# Altium PCB CL-HC-V2.1 浮点阀.PcbDoc (part 1 of 2)
Units mil, origin at the board's own origin, x right, y up, seen from the top; angles counter-clockwise.
Board outline 12846.15 x 9153.85 mil, 2 copper layers (TopLayer, BottomLayer); 128 components, 528 nets, 506 pads, 1 vias.
Unrouted connection lines stored in the file: 31.
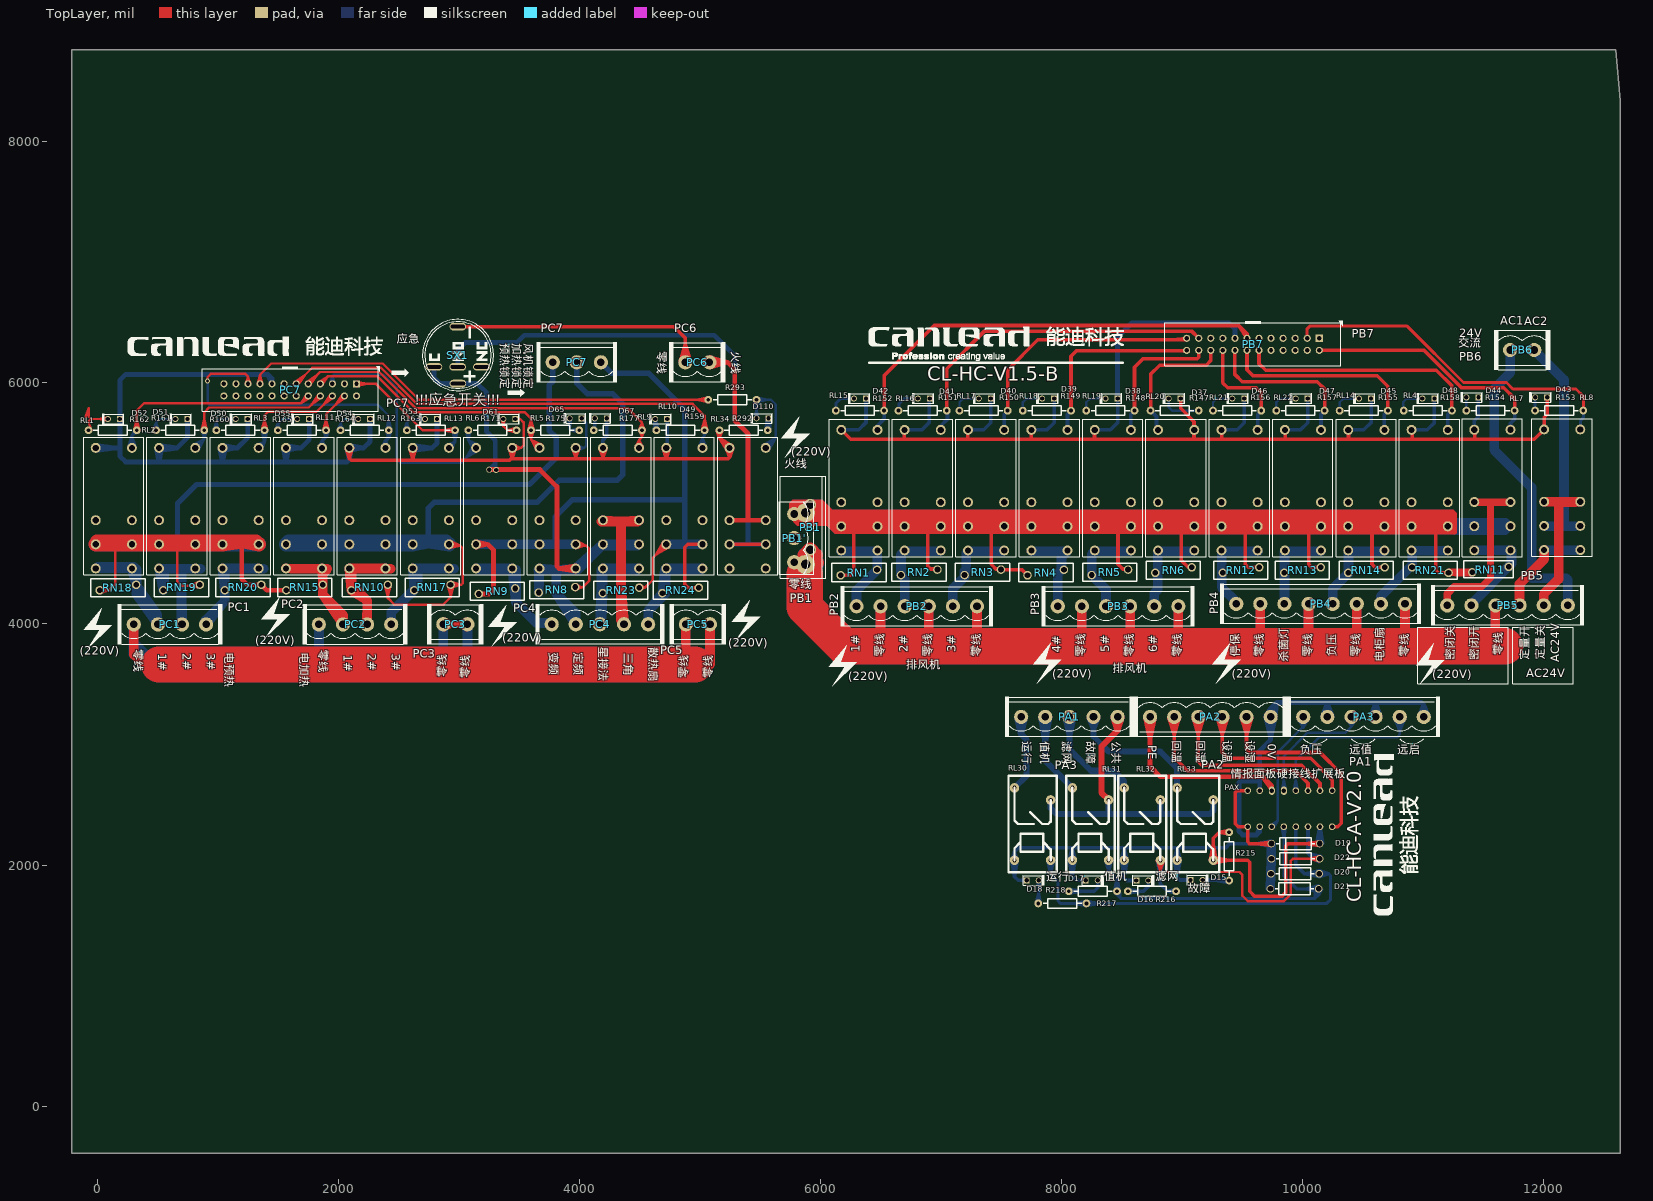
[diagram p0: TopLayer view]
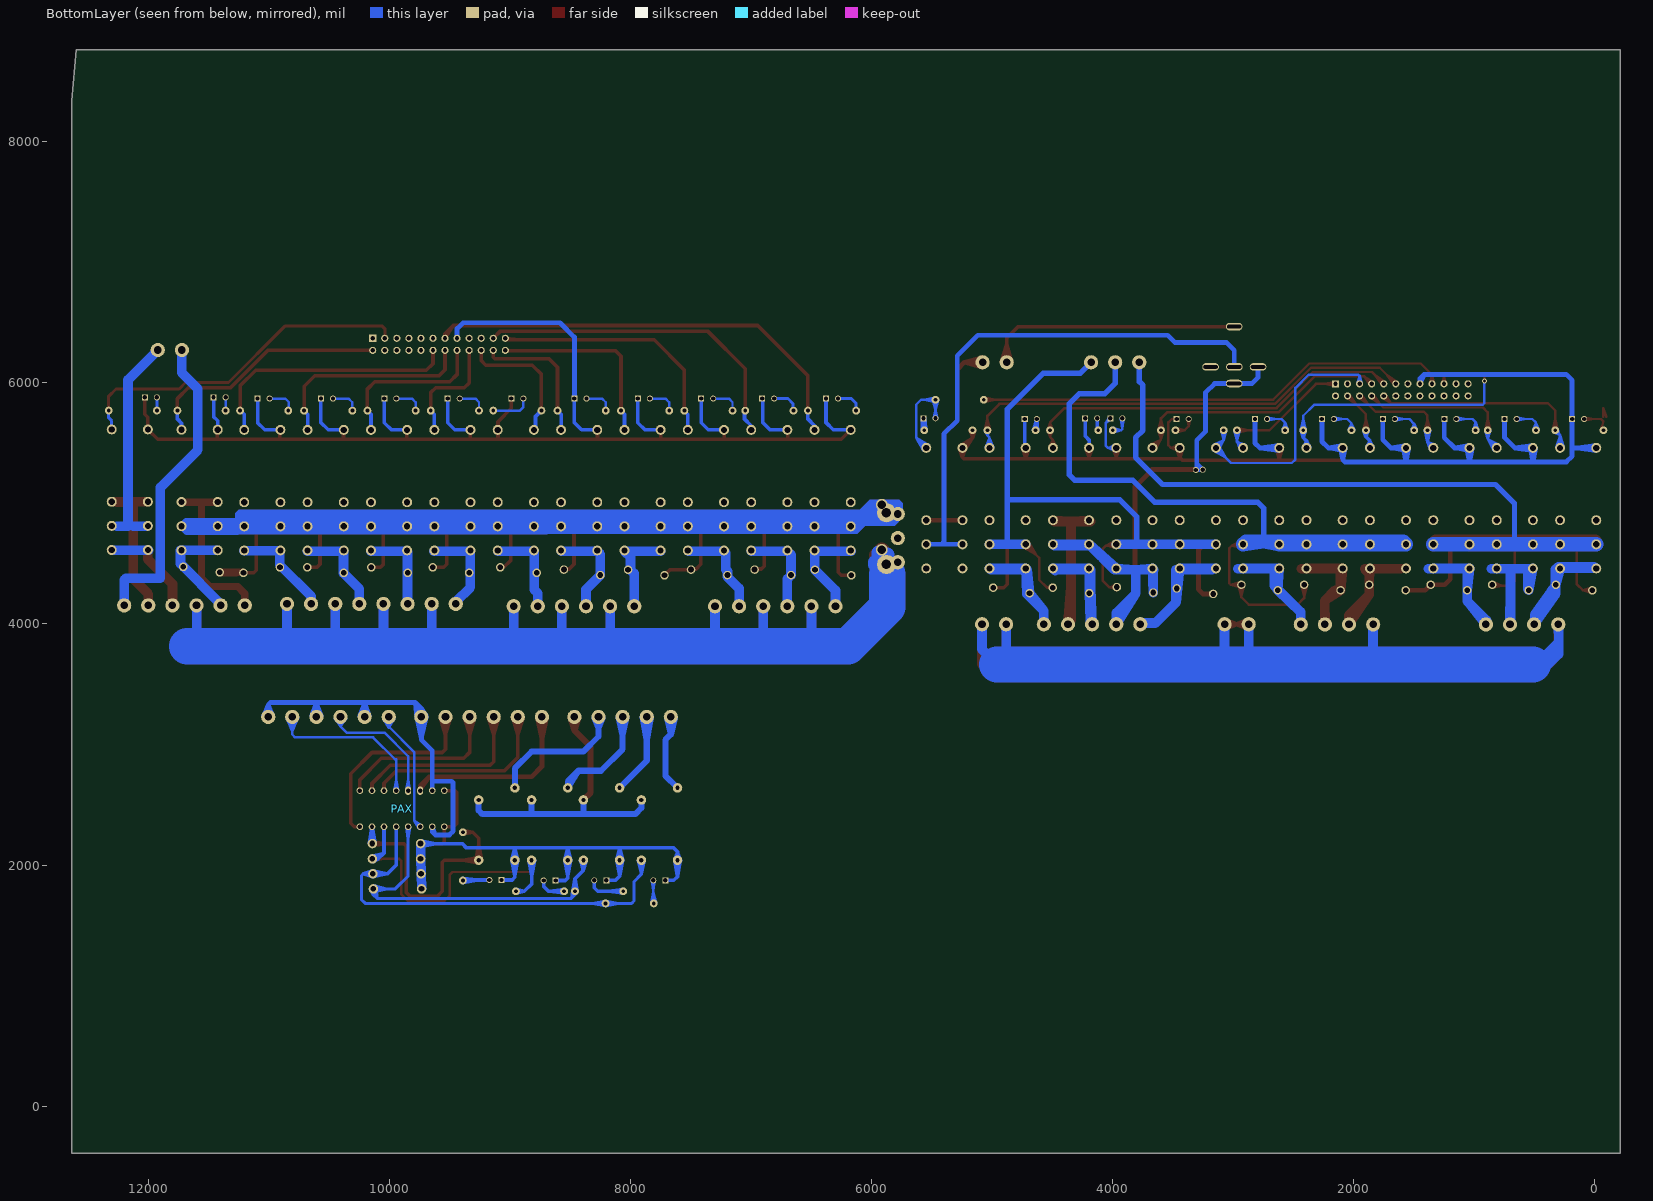
[diagram p1: BottomLayer view, seen from below]

## Layer stack, top to bottom
TopSolder: solder mask 0.4, Solder Resist, Dk 3.5
TopLayer: signal copper 1.4
Dielectric1: dielectric 12.6, FR-4, Dk 4.8
BottomLayer: signal copper 1.4
BottomSolder: solder mask 0.4, Solder Resist, Dk 3.5

## Board outline
12597.31,8763.6 -210.38,8763.6 -210.38,-390.24 12635.77,-390.24 12635.77,8340.52

## Design rules (kind name [scope] priority, off if disabled: settings)
Clearance Clearance_1 [All] p1 off: gap=30
Clearance [All] p2: gap=15
ComponentClearance [All] p1 off: gap=10 collisioncheckmode=3 verticalgap=10 showdistances=FALSE
FabricationTestPointUsage TestPointUsage [All] p1: valid=0 allowmultiple=FALSE
FabricationTestpoint Testpoint [All] p1: side=3 testpointundercomponent=TRUE minsize=40 maxsize=100 preferedsize=60 minholesize=20 maxholesize=40 preferedholesize=32 testpointgrid=1 allowsidetop=TRUE allowsidebottom=TRUE usegrid=TRUE gridtolerance=0.01
PolygonConnect PolygonConnect_1 [All vs (InPadClass('All Pads'))] p1: connectstyle=NoConnect reliefconductorwidth=10 reliefentries=4 polygonreliefangle="90 Angle" airgapwidth=10
PolygonConnect [All] p2: connectstyle=Direct reliefconductorwidth=10 reliefentries=4 polygonreliefangle="90 Angle" airgapwidth=10
RoomDefinition patch [InComponentClass('patch')] p1: confinementstyle=ConfineIn formatcopy=TRUE lockcomponents=FALSE outline -2150,7720.31 -950,7720.31 -950,4279.31 -2150,4279.31
RoomDefinition Lights [InComponentClass('Lights')] p2: confinementstyle=ConfineIn formatcopy=TRUE lockcomponents=FALSE outline 14197.83,3159.45 15242.13,3159.45 15242.13,3920.28 14197.83,3920.28
RoomDefinition MCU单片机 [InComponentClass('MCU单片机')] p3: confinementstyle=ConfineIn formatcopy=TRUE lockcomponents=FALSE outline 15430.12,9928.15 13948.82,9928.15 13948.82,10710.63 15430.12,10710.63
RoutingVias [All] p1: holewidth=24 width=40 viastyle="Through Hole" minholewidth=24 minwidth=40 maxholewidth=24 maxwidth=40
SilkToSolderMaskClearance SilkscreenOverComponentPads [IsPad] p1: minsilkscreentomaskgap=10 clearancetoexposedcopper=TRUE
SolderMaskExpansion [All] p1: expansion=4
Width [All] p1: maxlimit=300 minlimit=10 preferedwidth=30
25 further rules are at their usual default settings.

## Classes and differential pairs
component class Lights: D74 Q11 R118 R194 RN22 Y1 Y2
component class MCU单片机: 1 24V C1 C2 C3 C4 C5 C6 C7 C8 C19 C20 C29 C30 C31 C32 C34 C35 CU1 F F2 P P1 R2 R11 R12 R13 R35 R79 U1 VR1 ѹ? 冷/自/热 定频/变频 客户接线自动门1 情报面 星/三角 电柜内部1 电柜内部2 电柜风扇

## Components (designator, comment, footprint, x,y, rotation, side; value= is the part's Value field where it differs from the comment)
D15 "" RT_LED1 9120.84,1876.11 r180 top (schematic designator D64)
D16 "" RT_LED1 8670.84,1872.22 r180 top (schematic designator D63)
D17 "" RT_LED1 8250.84,1872.74 r180 top (schematic designator D62)
D18 "" RT_LED1 7760.84,1872.74 r180 top (schematic designator D59)
D19 "1n4007" DIODEAK 9941.29,2178.21 r180 top (schematic designator D70)
D20 "1n4007" DIODEAK 9937.32,1927.75 r180 top (schematic designator D69)
D21 "1n4007" DIODEAK 9933.09,1802.53 r180 top (schematic designator D4)
D22 "1n4007" DIODEAK 9941.29,2051.4 r180 top (schematic designator D68)
D37 "GREEN" RT_LED1 8938.5,5869.33 r0 top
D38 "GREEN" RT_LED1 8415.4,5869.33 r0 top
D39 "GREEN" RT_LED1 7889.77,5869.33 r0 top
D40 "GREEN" RT_LED1 7364.14,5869.33 r0 top
D41 "GREEN" RT_LED1 6858.5,5869.33 r0 top
D42 "RED" RT_LED1 6328.5,5869.33 r0 top
D43 "GREEN" RT_LED1 11978.5,5879.33 r0 top
D44 "GREEN" RT_LED1 11408.5,5879.33 r0 top
D45 "GREEN" RT_LED1 10517.93,5869.33 r0 top
D46 "" RT_LED1 9466.67,5869.33 r0 top
D47 "GREEN" RT_LED1 9992.3,5869.33 r0 top
D48 "GREEN" RT_LED1 11043.56,5869.33 r0 top
D49 "GREEN" RT_LED1 4680,5700 r0 top
D50 "GREEN" RT_LED1 1200,5700 r0 top locked
D51 "" RT_LED1 700,5700 r0 top locked
D52 "GREEN" RT_LED1 140,5700 r0 top locked
D53 "GREEN" RT_LED1 2770,5700 r0 top locked
D54 "GREEN" RT_LED1 2215.64,5700 r0 top locked
D55 "GREEN" RT_LED1 1710,5700 r0 top locked
D61 "GREEN" RT_LED1 3420,5700 r0 top locked
D65 "GREEN" RT_LED1 3970,5705 r0 top locked
D67 "GREEN" RT_LED1 4179.27,5705.92 r0 top
D110 "GREEN" RT_LED1 5520,5705.92 r0 top
PA1 "情报面板与电柜输入" pl5xQ 8065.44,3228.9 r0 top (schematic designator 外?)
PA2 "模拟-硬连接" PL6XQ 9235.11,3228.9 r180 top (schematic designator 外?)
PA3 "外接情报面板接口1" PL6XQ 10505.44,3228.9 r0 top
PAX "Header 8X2" centipede-16 9894.59,2467.3 r90 bottom (schematic designator P19)
PB1 "硬接线" 95-2P 5915.74,4614.99 r90 top (schematic designator AC24Vin2)
PB1' "硬接线" PL3X 5782.6,4512.08 r90 top (schematic designator 客户接线1)
PB2 "Header 6" PL6XQ 6799.43,4146.34 r0 top (schematic designator 客户接线2)
PB3 "Header 6" PL6XQ 8469.43,4146.34 r0 top (schematic designator 客户接线3)
PB4 "Header 8" PL8XQ 10149.43,4166.34 r0 top (schematic designator 杀菌/停保)
PB5 "硬接线" PL6XQ 11700.08,4153.96 r0 top (schematic designator 客接新?)
PB6 "硬接线" PL2XQ 11821.07,6272.28 r180 top (schematic designator AC24Vin2)
PB7 "Con2*12-1mm" FC24LX 9588.5,6319.33 r180 top (schematic designator P21)
PC1 "Header 4" PL4XQ 605.12,3995.93 r0 top locked (schematic designator 再热)
PC2 "Header 4" PL4XQ 2140.12,3995.93 r0 top locked (schematic designator 预热)
PC3 "硬接线" PL2XQ 2972.64,3996.99 r180 top locked (schematic designator P24)
PC4 "硬接线" PL5XQ 4171.46,3996.99 r180 top locked (schematic designator 送风机)
PC5 "硬接线" PL2XQ 4984.85,3996.99 r180 top locked (schematic designator P24)
PC6 "硬接线" PL2XQ 4980,6170 r180 top (schematic designator AC24Vin2)
PC7 "Con2*12-1mm" FC24LX 1602.35,5941.59 r180 top (schematic designator P21)
PC7 "Header 3" PL3XQ 3780,6170 r0 top (schematic designator 火线)
R147 "15K" AXIAL0.4 9138.5,5769.33 r180 top
R148 "15K" AXIAL0.4 8205.93,5769.7 r0 top
R149 "15K" AXIAL0.4 7679.77,5769.33 r0 top
R150 "15K" AXIAL0.4 7154.14,5769.33 r0 top
R151 "15K" AXIAL0.4 6649.03,5769.33 r0 top
R152 "15K" AXIAL0.4 6129.03,5769.7 r0 top
R153 "15K" AXIAL0.4 11929.03,5770.06 r0 top
R154 "15K" AXIAL0.4 11359.03,5769.7 r0 top
R155 "15K" AXIAL0.4 10307.93,5769.33 r0 top
R156 "15K" AXIAL0.4 9257.19,5769.7 r0 top
R157 "15K" AXIAL0.4 9782.82,5769.7 r0 top
R158 "15K" AXIAL0.4 10839.03,5769.7 r0 top
R159 "15K" AXIAL0.4 4640.38,5606.68 r0 top locked
R160 "15K" AXIAL0.4 990.38,5606.68 r0 top locked
R161 "15K" AXIAL0.4 490.38,5606.68 r0 top locked
R162 "15K" AXIAL0.4 -69.62,5606.68 r0 top locked
R163 "15K" AXIAL0.4 2570.38,5606.68 r0 top locked
R164 "15K" AXIAL0.4 2020.38,5606.68 r0 top locked
R165 "15K" AXIAL0.4 1500.38,5606.68 r0 top locked
R171 "15K" AXIAL0.4 3479.48,5605.94 r180 top locked
R175 "15K" AXIAL0.4 3999.83,5605.94 r180 top locked
R177 "15K" AXIAL0.4 4120.52,5606.68 r0 top locked
R215 "15K" AXIAL0.4 9390.47,1872.75 r90 top (schematic designator R174)
R216 "15K" AXIAL0.4 8551.36,1782.59 r0 top (schematic designator R173)
R217 "15K" AXIAL0.4 8061.36,1782.59 r0 top (schematic designator R172)
R218 "15K" AXIAL0.4 7807.35,1682.59 r0 top (schematic designator R169)
R292 "15K" AXIAL0.4 5163.91,5606.68 r0 top
R293 "15K" AXIAL0.4 5070.52,5859.7 r0 top (schematic designator R292)
RL1 "三级预热" HF115-5#1 139.33,4960.44 r0 top locked
RL2 "二级预热" HF115-5#1 665.21,4960.44 r0 top locked
RL3 "一级预热" HF115-5#1 1191.08,4960.44 r0 top locked
RL4 "送风机散热风扇" HF115-5#1 11054.09,5109.8 r0 top
RL5 "送风机定频起停" HF115-5#1 3820.45,4960.44 r0 top locked
RL6 "送风机变频起停" HF115-5#1 3294.58,4960.44 r0 top locked
RL7 "新风密闭执行" HF115-5#1 11574.12,5110.92 r0 top
RL8 "新风定量执行" HF115-5#1 12153.49,5113.54 r0 top
RL9 "星三角切换" HF115-5#1 4346.32,4960.44 r0 top locked
RL10 "电柜散热风扇" HF115-5#1 4872.2,4960.44 r0 top locked
RL11 "三级再热" HF115-5#1 1716.95,4960.44 r0 top locked
RL12 "二级再热" HF115-5#1 2242.83,4960.44 r0 top locked
RL13 "一级再热" HF115-5#1 2768.7,4960.44 r0 top locked
RL14 "负压排风" HF115-5#1 10528.46,5109.8 r0 top
RL15 "6#排风机" HF115-5#1 6323.4,5109.8 r0 top
RL16 "5#排风机" HF115-5#1 6849.03,5109.8 r0 top
RL17 "4#排风机" HF115-5#1 7374.67,5109.8 r0 top
RL18 "3#排风机" HF115-5#1 7900.3,5109.8 r0 top
RL19 "2#排风机" HF115-5#1 8425.93,5109.8 r0 top
RL20 "1#排风机" HF115-5#1 8951.56,5109.8 r0 top
RL21 "停机保护" HF115-5#1 9477.2,5109.8 r0 top
RL22 "杀菌灯" HF115-5#1 10002.83,5109.8 r0 top
RL30 "POL->运行监控" RELAY12V 7510.11,2640.09 r270 top (schematic designator RL33)
RL31 "POL->值机监控" RELAY12V 7990.84,2640.09 r270 top (schematic designator RL32)
RL32 "POL->加湿电磁阀" RELAY12V 8420.51,2640.09 r270 top (schematic designator RL31)
RL33 "POL->加湿电磁阀" RELAY12V 8859.23,2640.09 r270 top (schematic designator RL30)
RL34 "星三角切换" HF115-5#2 5396.7,4960.44 r180 top locked
RN1 "1D471" RAD0.3#1 6319.43,4426.34 r180 top
RN2 "1D471" RAD0.3#1 6819.93,4428.06 r0 top
RN3 "1D471" RAD0.3#1 7347.05,4428.06 r0 top
RN4 "1D471" RAD0.3#1 7869.43,4426.34 r180 top
RN5 "1D471" RAD0.3#1 8401.28,4428.06 r0 top
RN6 "1D471" RAD0.3#1 8929.43,4446.34 r0 top
RN8 "1D471" RAD0.3#1 3814.63,4283.07 r0 top locked
RN9 "1D471" RAD0.3#1 3318.25,4271.59 r180 top locked
RN10 "1D471" RAD0.3#1 2261.7,4302.39 r0 top locked
RN11 "1D471" RAD0.3#1 11558.45,4450.9 r180 top
RN12 "1D471" RAD0.3#1 9489.43,4446.34 r0 top
RN13 "1D471" RAD0.3#1 9999.43,4446.34 r0 top
RN14 "1D471" RAD0.3#1 10529.43,4446.34 r0 top
RN15 "1D471" RAD0.3#1 1721.7,4302.39 r180 top locked
RN17 "1D471" RAD0.3#1 2781.7,4302.39 r0 top locked
RN18 "1D471" RAD0.3#1 173.13,4301.74 r180 top locked
RN19 "1D471" RAD0.3#1 701.7,4302.39 r0 top locked
RN20 "1D471" RAD0.3#1 1211.7,4302.39 r0 top locked
RN21 "1D471" RAD0.3#2 11059.43,4446.34 r0 top
RN23 "1D471" RAD0.3#1 4346.39,4278.31 r0 top locked
RN24 "1D471" RAD0.3#1 4841.02,4278.31 r0 top locked
SX1 "Comment" LA128A 2991.85,6230.27 r90 top

## Footprints (in the part's own frame and the unit in brackets; to place one, negate y for a bottom-side part, rotate by r counter-clockwise, add the part's x,y. Pads: shape width x height; smd on the part's side, far side on the other; paste and mask are expansions set on the pad)
95-2P [mm]
  round 2.5 hole 1.8: 1(0,0) 2(9.5,0)
  silkscreen extent -6,-3.3 15.5,6.28
AXIAL0.4 [mil]
  round 65 hole 32: 1(-0.52,-0.37) 2(399.48,-0.37)
  silkscreen extent 39,-40 359,40, body extent -12,-45 412,46, height 116
centipede-16 [mil]
  round 55 hole 36: 1(150,-350) 2(-150,-350) 3(150,-250) 4(-150,-250) 6(-150,-150) 8(-150,-50) 9(150,50) 10(-150,50) 11(150,150) 12(-150,150) 13(150,250) 14(-150,250) 15(150,350) 16(-150,350)
  oval 70x50 hole 36: 5(150,-150) 7(150,-50)
DIODEAK [mm]
  round 1.6 / inner round 1.6 / far side round 2 hole 1.2: A(-5.08,0) K(5.08,0)
  silkscreen extent -4.06,-1.27 4.06,1.27, body extent -5.53,-1.3 5.53,1.3, height 3.3
FC24LX [mm]
  rect 1.5x1.5 hole 0.9: 1(-13.97,-1.27)
  round 1.5 hole 0.9: 2(-13.97,1.27) 3(-11.43,-1.27) 4(-11.43,1.27) 5(-8.89,-1.27) 6(-8.89,1.27) 7(-6.35,-1.27) 8(-6.35,1.27) 9(-3.81,-1.27) 10(-3.81,1.27) 11(-1.27,-1.27) 12(-1.27,1.27) 13(1.27,-1.27) 14(1.27,1.27) 15(3.81,-1.27) 16(3.81,1.27) 17(6.35,-1.27) 18(6.35,1.27) 19(8.89,-1.27) 20(8.89,1.27) 21(11.43,-1.27) 22(11.43,1.27) 23(13.97,-1.27) 24(13.97,1.27)
  silkscreen extent -18.9,-5.01 18.54,4.5
HF115-5#1 [mm]
  round 2.1 hole 1.3: 1(-3.81,12.7) 2(3.81,12.7) 3(-3.81,-12.7) 3(3.81,-12.7) 4(-3.81,-7.62) 4(3.81,-7.62) 5(-3.81,-2.54) 5(3.81,-2.54)
  silkscreen extent -6.37,-14.01 6.33,14.99
HF115-5#2 [mm]
  round 2.1 hole 1.3: 1(-3.81,-12.7) 2(3.81,-12.7) 3(-3.81,12.7) 3(3.81,12.7) 4(-3.81,7.62) 4(3.81,7.62) 5(-3.81,2.54) 5(3.81,2.54)
  silkscreen extent -6.37,-14.99 6.33,14.01
LA128A [mm]
  oval 1.6x3.5 hole 0.7 slot 3 at 90 deg: 2(6,-0.035) 3(-6,-0.045) 3(-2.5,5) 4(-2.5,0) 5(-2.5,-5)
  silkscreen extent -7.49,-7.56 7.51,7.44
PL2XQ [mm]
  round 3 hole 1.6: 1(-2.54,0) 2(2.54,0)
  silkscreen extent -5.95,-4.25 5.95,4.25
PL3X [mm]
  round 3 hole 1.6: 1(0,0) 2(5.08,0) 3(10.16,0)
  silkscreen extent -2.54,-4.13 12.7,3.18
PL3XQ [mm]
  round 3 hole 1.6: 1(0,0) 2(5.08,0) 3(10.16,0)
  silkscreen extent -3.41,-4.25 13.57,4.25
PL4XQ [mm]
  round 3 hole 1.6: 1(-7.62,0) 2(-2.54,0) 3(2.54,0) 4(7.62,0)
  silkscreen extent -11.03,-4.25 11.03,4.25
pl5xQ [mm]
  round 3 hole 1.6: 1(-10.16,0) 2(-5.08,0) 3(0,0) 4(5.08,0) 5(10.16,0)
  silkscreen extent -13.57,-4.25 13.57,4.25
PL5XQ [mm]
  round 3 hole 1.6: 1(-10.16,0) 2(-5.08,0) 3(0,0) 4(5.08,0) 5(10.16,0)
  silkscreen extent -13.57,-4.25 13.57,4.25
PL6XQ [mm]
  round 3 hole 1.6: 1(-12.7,0) 2(-7.62,0) 3(-2.54,0) 4(2.54,0) 5(7.62,0) 6(12.7,0)
  silkscreen extent -16.11,-4.25 16.11,4.25
PL8XQ [mm]
  round 3 hole 1.6: 1(-17.78,0) 2(-12.7,0) 3(-7.62,0) 4(-2.54,0) 5(2.54,0) 6(7.62,0) 7(12.7,0) 8(17.78,0)
  silkscreen extent -21.19,-4.25 21.19,4.25
RAD0.3#1 [mm]
  round 1.8 hole 1.2: 1(3.84,0.58) 2(-3.84,-0.58)
  silkscreen extent -5.76,-1.91 5.67,1.91
RAD0.3#2 [mm]
  round 1.8 hole 1.2: 1(3.84,-0.58) 2(-3.84,0.58)
  silkscreen extent -5.76,-1.91 5.67,1.91
RELAY12V [mm]
  round 2 hole 0.9: 1(15.24,2.54) 2(15.24,10.16) 3(0,2.54) 4(2.54,10.16)
  silkscreen extent -2.54,1.27 17.78,11.43
RT_LED1 [mil]
  rect 50x50 hole 36: A(50,0)
  round 50 hole 36: K(-50,0)
  silkscreen extent -100,-44 84,44, body extent -84,-44 84,44, height 236

## Part data
D15 D16 D17 D18 D37 D38 D39 D40 D41 D42 D43 D44 D45 D46 D47 D48 D49 D50 D51 D52 D53 D54 D55 D61 D65 D67 D110: library part LED, "Zener Diode"
D19 D20 D21 D22: library part DIODE, "Diode"
PA1: library part "Header 5", "Header, 5-Pin"
PA2 PA3: library part "Header 6", "Header, 6-Pin"
PAX: "Header, 8-Pin, Dual"
PC3 PC5: library part "Header 2", "Header, 2-Pin"
R147 R148 R149 R150 R151 R152 R153 R154 R155 R156 R157 R158 R159 R160 R161 R162 R163 R164 R165 R171 R175 R177 R215 R216 R217 R218 R292 R293: library part RES2
RL1 RL2 RL3 RL4 RL5 RL6 RL10 RL11 RL12 RL13 RL14 RL15 RL16 RL17 RL18 RL19 RL20 RL21 RL22 RL30 RL31 RL32 RL33: library part RELAY
RL34: library part HF3FF
RN1 RN2 RN3 RN4 RN5 RN6 RN8 RN9 RN10 RN11 RN12 RN13 RN14 RN15 RN17 RN18 RN19 RN20 RN21 RN23 RN24: library part RN

## Free pads (board coordinates)
  round 50 hole 36: 0(3253.63,5279.81) 1(3310.78,5277.45)
  round 157.48 hole 78.74: 0(5876.88,4493.05) 0(5876.88,4922.18)
  round 65 hole 36: 0(11427.56,5602.53)

## Via types
v1: diameter 40, hole 24, TopLayer to BottomLayer, tented both sides, 1 vias

## Nets (pads, with @x,y where several pads share a name; then routed paths per layer and width w, separated by ;. In a path a pad name is that pad's centre, name@x,y a point inside that pad or via, vN(x,y) a via of type N, cw(c..) or ccw(c..) an arc to the next point about the centre after c; other vN are vias at no path point)
1C2: PC4.5 RL6.3 RN9.2 | length 2620.2
  BottomLayer w80: RL6.3@3144.58,4460.44 RL6.3@3429.84,4449.16 ; RL6.3@3161.15,4459.79 RL6.3@3444.58,4460.44 ; PC4.5@3771.02,4008.31 3646.66,4008.31 ; PC4.5@3771.46,3996.99 3646.66,4008.31 ; RL6.3@3444.58,4460.44 RN9.2@3469.44,4294.42 ; RL6.3@3444.58,4460.44 3475.47,4179.49 ; RL6.3@3444.58,4460.44 3175.47,4449.16 RL6.3@3475.47,4449.16 ; RN9.2@3469.44,4294.42 RL6.3@3475.47,4449.16 ; RN9.2@3469.44,4294.42 3475.47,4179.49 ; 3475.47,4179.49 RL6.3@3475.47,4449.16 ; 3475.47,4179.49 3646.66,4008.31
1C3: pad.0@3253.63,5279.81 pad.1 PC4.4 RL5.3 RL9.4 RN8.2 SX1.3 | length 8274.6
  TopLayer w40: 3398.63,5279.8 pad.0@3253.63,5279.81 pad.1@3310.78,5277.45 ; 3455.88,5279.8 pad.1@3310.78,5277.45 ; RL5.3@3968.79,4439.17 3833.34,4460.44 ; RL5.3@3968.79,4481.72 3833.34,4460.44 ; RL5.3@3970.45,4460.44 3833.34,4460.44 ; pad.1@3310.78,5277.45 pad.0@3253.63,5279.81 3673.36,5279.8 3814.32,5138.84 3814.32,4479.47 3833.34,4460.44
  BottomLayer w39.37: SX1.3@2794.99,6131.84 2794.99,6045.01 2845.95,5994.05 SX1.3@2993.62,5994.05 3155.95,5994.05 3230,5920 3230,5596.32 3302.7,5523.62 3302.7,5328.88 ; pad.1@3302.7,5290 3302.7,5328.88 ; pad.0@3253.63,5279.81 3302.7,5328.88 ; pad.0@3253.63,5279.81 3308.42,5279.81 pad.1@3310.78,5277.45 pad.0@3253.63,5279.81
  BottomLayer w80: RL5.3@3659.16,4449.26 RL5.3@3661.02,4447.4 ; PC4.4@3971.02,4008.31 3971.02,4091.54 ; RL5.3@3975.31,4464.72 RL9.4@4196.32,4660.44 ; RL5.3@3985.17,4449.56 RL9.4@4196.32,4660.44 ; RL9.4@4195.63,4660.01 RL9.4@4184.87,4649.26 ; RL9.4@4213.45,4649.26 RL9.4@4496.32,4660.44 ; RL9.4@4478.52,4649.26 RL9.4@4196.32,4660.44 ; RL9.4@4479.91,4659.79 RL9.4@4196.32,4660.44 ; RL9.4@4484.87,4649.26 RL9.4@4184.87,4649.26 ; RL5.3@3661.02,4447.4 3662.88,4449.26 3817.54,4449.26 ; RL5.3@3661.02,4447.4 RL5.3@3663.45,4444.97 ; RN8.2@3663.45,4260.23 RL5.3@3663.45,4444.97 ; RN8.2@3663.45,4260.23 RL5.3@3670.45,4460.44 ; RN8.2@3663.45,4260.23 RL5.3@3663.45,4444.97 ; RN8.2@3663.45,4260.23 RL5.3@3670.45,4460.44 ; RL5.3@3670.45,4460.44 3817.54,4449.26 ; 3807.92,4254.63 3807.92,4439.64 3817.54,4449.26 ; 3807.92,4254.63 3971.02,4091.54 ; 3807.92,4254.63 PC4.4@3971.46,3996.99 ; 3817.54,4449.26 3984.87,4449.26 RL9.4@4184.87,4649.26 ; 3817.54,4449.26 RL5.3@3970.45,4460.44 RL9.4@4184.87,4649.26 ; 3971.02,4091.54 PC4.4@3971.46,3996.99 ; 3971.02,4091.54 PC4.4@3971.46,3996.99
1C6: PB4.7 RL4.3 RN21.2 | length 848.7
  BottomLayer w80: PB4.7@10649.43,4166.34 10649.43,4230.28 10909.59,4490.44 10909.59,4607.29 RL4.3@11209.59,4607.29
1C7: PC1.4 RL3.3 RN20.2 | length 2184.2
  BottomLayer w80: PC1.4@900.51,4029.25 1060.52,4189.26 ; PC1.4@905.12,3995.93 1060.52,4189.26 ; RL3.3@1059.5,4460.22 RL3.3@1341.08,4460.44 ; RL3.3@1322.53,4456.99 RL3.3@1041.08,4460.44 ; RL3.3@1041.08,4460.44 1084.49,4456.99 ; RL3.3@1041.08,4460.44 RN20.2@1060.52,4279.56 ; RL3.3@1041.08,4460.44 1084.49,4456.99 ; 1060.52,4189.26 RN20.2@1060.52,4279.56 ; RN20.2@1060.52,4279.56 1060.52,4433.02 1084.49,4456.99 ; 1084.49,4456.99 1384.49,4456.99 RL3.3@1341.08,4460.44 ; 1084.49,4456.99 RL3.3@1341.08,4460.44
1C8: PC1.3 RL2.3 RN19.2 | length 2167.6
  BottomLayer w80: PC1.3@700.51,4029.25 700.51,4456.99 ; 700.51,4295.3 PC1.3@705.12,3995.93 ; RL2.3@515.21,4460.44 700.51,4456.99 ; RL2.3@515.21,4460.44 558.85,4456.99 ; RL2.3@515.21,4460.44 558.85,4456.99 ; RL2.3@515.21,4460.44 558.85,4287.9 558.85,4456.99 ; RL2.3@515.21,4460.44 RN19.2@550.52,4279.56 558.85,4456.99 ; 558.85,4456.99 700.51,4456.99 ; 700.51,4456.99 858.85,4456.99 RL2.3@815.21,4460.44 700.51,4456.99
1C9: PC1.2 RL1.3 RN18.2 | length 3415.8
  BottomLayer w80: RL1.3@-10.67,4460.44 RL1.3@273.28,4473.78 ; RL1.3@4.99,4461.18 RL1.3@289.33,4460.44 ; RL1.3@6.2,4473.78 306.2,4473.78 RL1.3@328.25,4451.73 ; RL1.3@6.89,4473.78 RL1.3@289.33,4460.44 ; 356.43,4278.95 PC1.2@505.12,3995.93 ; PC1.2@500.51,4029.25 500.51,4074.25 ; RL1.3@289.33,4460.44 RN18.2@328.25,4319.38 ; RL1.3@289.33,4460.44 RN18.2@324.31,4324.58 ; 324.31,4250.45 324.31,4287.18 ; 324.31,4250.45 500.51,4074.25 ; 324.31,4250.45 RN18.2@324.31,4324.58 ; 324.31,4250.45 PC1.2@505.12,3995.93 ; 324.31,4287.18 RN18.2@324.31,4324.58 ; 324.31,4287.18 328.25,4291.11 RN18.2@328.25,4319.38 ; 324.31,4287.18 RN18.2@324.31,4324.58 ; RN18.2@324.31,4324.58 RL1.3@328.25,4451.73 ; RN18.2@324.31,4324.58 500.51,4074.25 ; RN18.2@328.25,4319.38 RL1.3@328.25,4451.73 ; 500.51,4074.25 PC1.2@505.12,3995.93 ; 500.51,4074.25 PC1.2@505.12,3995.93 ; 500.51,4074.25 PC1.2@505.12,3995.93
1C10: PC2.4 RL13.3 RN17.2 | length 2878.6
  BottomLayer w80: PC2.4@2440.12,3995.93 2441.7,4098.79 ; PC2.4@2441.7,4002.39 2441.7,4098.79 ; RL13.3@2900.15,4456.99 RL13.3@2618.7,4460.44 ; 2441.7,4098.79 2661.38,4318.48 ; 2441.7,4098.79 RN17.2@2630.52,4279.56 ; RL13.3@2618.7,4460.44 2661.38,4456.99 ; RL13.3@2618.7,4460.44 2661.38,4318.48 ; RL13.3@2618.7,4460.44 2661.38,4456.99 ; RL13.3@2618.7,4460.44 RL13.3@2918.7,4460.44 ; RL13.3@2618.7,4460.44 2661.38,4456.99 ; RL13.3@2618.7,4460.44 RN17.2@2630.52,4279.56 ; RN17.2@2630.52,4279.56 2661.38,4456.99 ; RN17.2@2630.52,4279.56 2661.38,4318.48 ; RN17.2@2630.52,4279.56 2661.38,4318.48 ; RN17.2@2630.52,4279.56 2661.38,4318.48 ; 2661.38,4318.48 2661.38,4456.99 ; 2661.38,4456.99 2961.38,4456.99 RL13.3@2918.7,4460.44 ; 2661.38,4456.99 RL13.3@2918.7,4460.44
1C11: PC2.3 RL12.3 RN10.2 | length 2624.8
  TopLayer w80: PC2.3@2240.12,3995.93 2241.7,4193.67 ; PC2.3@2241.7,3997.69 2241.7,4193.67 ; RL12.3@2374.28,4456.99 RL12.3@2092.83,4460.44 ; RL12.3@2092.83,4460.44 2135.75,4456.99 ; RL12.3@2092.83,4460.44 2135.75,4456.99 ; RL12.3@2092.83,4460.44 RN10.2@2110.52,4279.56 ; RL12.3@2092.83,4460.44 RL12.3@2392.83,4460.44 ; RL12.3@2092.83,4460.44 2135.75,4456.99 ; RL12.3@2092.83,4460.44 RN10.2@2110.52,4279.56 ; RN10.2@2110.52,4279.56 2155.81,4279.56 ; RN10.2@2110.52,4279.56 2110.52,4431.75 2135.75,4456.99 ; RN10.2@2110.52,4279.56 2241.7,4193.67 ; RN10.2@2110.52,4279.56 2155.81,4279.56 ; 2135.75,4456.99 2435.75,4456.99 RL12.3@2392.83,4460.44 ; 2135.75,4456.99 RL12.3@2392.83,4460.44 ; 2155.81,4279.56 2241.7,4193.67
1C12: PC2.2 RL11.3 RN15.2 | length 1861.7
  TopLayer w80: PC2.2@2041.7,3997.69 2041.7,4073.06 ; 1769.05,4456.99 1910.12,4456.99 ; 1769.05,4456.99 1610.12,4456.99 RL11.3@1566.95,4460.44 1769.05,4456.99 ; 1769.05,4456.99 RL11.3@1866.95,4460.44 ; RL11.3@1866.95,4460.44 RN15.2@1872.88,4325.23 ; RL11.3@1866.95,4460.44 1910.12,4456.99 ; RL11.3@1866.95,4460.44 1910.12,4456.99 ; 1872.88,4241.88 RN15.2@1872.88,4325.23 ; 1872.88,4241.88 2041.7,4073.06 ; 1872.88,4241.88 PC2.2@2040.12,3995.93 ; RN15.2@1872.88,4325.23 1872.88,4419.75 1910.12,4456.99 ; PC2.2@2040.12,3995.93 2041.7,4073.06 ; PC2.2@2040.12,3995.93 2041.7,4073.06
1C17: PC4.1 RL10.3 RN24.2 | length 2562.2
  BottomLayer w80: PC4.1@4571.02,4008.31 4571.02,4108.61 ; PC4.1@4571.46,3996.99 4571.02,4108.61 ; RL10.3@4738.18,4459.76 RL10.3@5022.2,4460.44 RL10.3@4739.08,4448.31 ; RL10.3@5004.56,4448.31 RL10.3@4722.2,4460.44 ; RL10.3@5011.02,4448.31 RL10.3@4711.02,4448.31 ; 4571.02,4108.61 RN24.2@4711.02,4248.61 ; 4571.02,4108.61 RN24.2@4689.84,4255.47 ; RN24.2@4689.84,4255.47 RL10.3@4711.02,4448.31 ; RN24.2@4689.84,4255.47 RL10.3@4722.2,4460.44 ; RN24.2@4711.02,4248.61 RL10.3@4711.02,4448.31 ; RN24.2@4711.02,4248.61 RL10.3@4722.2,4460.44
1C22: PB4.3 RL22.3 RN13.2 | length 738.7
  BottomLayer w80: PB4.3@9849.43,4166.34 9849.43,4596.56 9855.4,4602.53 RL22.3@10155.4,4602.53
1C27: PB4.1 RL21.3 RN12.2 | length 766.8
  BottomLayer w80: PB4.1@9446.27,4185.23 9328.25,4303.25 9328.25,4601.09 9329.69,4602.53 RL21.3@9629.69,4602.53
1C31: PB4.5 RL14.3 RN14.2 | length 790.7
  BottomLayer w80: PB4.5@10249.43,4166.34 10249.43,4289.41 10381.11,4421.1 10381.11,4602.53 RL14.3@10681.11,4602.53
1C32: PB3.5 RL20.3 RN6.2 | length 768.7
  BottomLayer w80: PB3.5@8769.43,4146.34 8769.43,4255.57 8799.71,4285.85 8799.71,4602.53 RL20.3@9099.71,4602.53
1C33: PB3.3 RL19.3 RN5.2 | length 927.7
  BottomLayer w80: 8329.43,4325.9 RN5.2@8250.1,4405.23 ; PB3.3@8369.43,4146.34 8369.43,4285.9 RN5.2@8250.1,4405.23 ; RL19.3@8574,4602.53 8274,4602.53 8250.1,4578.64 RN5.2@8250.1,4405.23
1C34: PB3.1 RL18.3 RN4.2 | length 788.9
  BottomLayer w80: RL18.3@7748.28,4602.53 8048.28,4602.53 7999.84,4554.09 7999.84,4449.17 7969.43,4418.76 PB3.1@7969.43,4146.34
1C35: PB2.5 RL17.3 RN3.2 | length 807.2
  BottomLayer w80: PB2.5@7099.43,4146.34 7099.43,4294.48 7195.87,4390.92 7195.87,4436.81 7210.18,4451.13 7210.18,4590.14 7222.57,4602.53 RL17.3@7522.57,4602.53
1C36: PB2.3 RL16.3 RN2.2 | length 780.5
  BottomLayer w80: PB2.3@6699.43,4146.34 6699.43,4374.55 RN2.2@6668.75,4405.23 6668.75,4574.42 6696.86,4602.53 RL16.3@6996.86,4602.53
1C37: PB2.1 RL15.3 RN1.2 | length 827.3
  BottomLayer w80: RL15.3@6171.15,4602.53 6471.15,4602.53 6470.61,4601.99 RN1.2@6470.61,4449.17 6299.43,4277.99 PB2.1@6299.43,4146.34
2-38: 
2-39: 
2-40: 
2-41: 
3-24: 
3-25: 
3-26: 
3-27: 
3-28: 
3-69: PA1.1 RL30.3 | length 939.8
  BottomLayer w50: RL30.3@7610.11,2640.09 7710.84,2740.82 7710.84,3038.28 7665.44,3083.67 ; PA1.1@7631.62,3224.91 7665.44,3083.67 ; PA1.1@7665.44,3228.9 7665.44,3083.67 ; PA1.1@7699.26,3224.91 7665.44,3083.67
3-70: PA1.2 RL31.3 | length 1306
  BottomLayer w50: PA1.2@7831.5,3226.13 7865.44,3019.84 PA1.2@7899.38,3226.13 ; PA1.2@7865.44,3228.9 7865.44,2865.48 RL31.3@8090.84,2640.09 7945.4,2785.53
3-71: PA1.3 RL32.3 | length 1414
  BottomLayer w50: PA1.3@8031.6,3225.1 8065.44,3076.4 ; PA1.3@8065.44,3228.9 8065.44,3076.4 ; PA1.3@8099.28,3225.1 8065.44,3076.4 ; 8065.44,3076.4 8065.44,2961.78 8245.01,2782.22 8433.01,2782.22 ; 8433.01,2782.22 RL32.3@8520.51,2640.09 ; 8433.01,2782.22 8520.51,2694.72 ; RL32.3@8520.51,2640.09 8520.51,2694.72 ; RL32.3@8520.51,2640.09 8520.51,2694.72
3-72: PA1.4 RL33.3 | length 1305.1
  BottomLayer w50: PA1.4@8232.02,3222.36 8265.44,3140.16 ; PA1.4@8265.44,3228.9 8265.44,3140.16 ; PA1.4@8298.86,3222.36 8265.44,3140.16 ; RL33.3@8959.23,2640.09 8959.23,2801.86 8821.09,2940 8391.84,2940 8265.44,3066.4 8265.44,3140.16
10V-面板-温度输入: PA2.2 PAX.16 | length 1935.6
  TopLayer w30: PA2.2@9491.54,3222.39 9535.11,3079.84 PA2.2@9578.68,3222.39 ; PA2.2@9535.11,3228.9 9535.11,2959.66 9560.84,2933.93 10143.65,2933.93 10320.52,2757.06 10320.52,2345.95 10291.88,2317.3 PAX.16@10244.59,2317.3
10V-面板-湿度输入: PA2.3 PAX.15 | length 1687.1
  TopLayer w30: PA2.3@9291.54,3222.39 9335.11,3079.84 PA2.3@9378.68,3222.39 ; PA2.3@9335.11,3228.9 9335.11,2933.93 9384.36,2884.69 10068.37,2884.69 10244.59,2708.47 PAX.15@10244.59,2617.3
24V: D15.A D16.A D17.A D18.A D19.K D20.K D21.K D22.K D37.A D38.A D39.A D40.A D41.A D42.A D43.A D44.A D45.A D46.A D47.A D48.A D49.A D50.A D51.A D52.A D53.A D54.A D55.A D61.A D65.A D67.A pad.0@11427.56,5602.53 PAX.1 PAX.2 PB7.15 PC7.15 R292.1 RL1.1 RL2.1 RL3.1 RL4.1 RL5.2 RL6.2 RL7.1 RL8.1 RL9.1 RL10.1 RL11.1 RL12.1 RL13.1 RL14.1 RL15.1 RL16.1 RL17.1 RL18.1 RL19.1 RL20.2 RL21.1 RL22.1 RL30.1 RL31.1 RL32.1 RL33.1 RL34.2 | length 43080.9
  TopLayer w20: RL6.2@3444.58,5460.44 3516.48,5460.44 ; RL6.2@3445.47,5449.14 3516.48,5460.44 ; RL6.2@3445.47,5471.75 3516.48,5460.44 ; RL6.2@3451.41,5429.86 3516.48,5460.44 ; RL6.2@3451.41,5491.03 3516.48,5460.44 ; D61.A@3470,5700 3510.78,5700 ; D61.A@3472.28,5686.57 3510.78,5700 ; D61.A@3472.28,5713.43 3510.78,5700 ; RL5.2@3939.6,5454.93 3970.45,5371.32 ; RL5.2@3959.13,5459.72 3970.45,5371.32 ; 3967.81,5368.68 3970.45,5371.32 ; RL5.2@3970.45,5460.44 3970.45,5371.32 ; RL5.2@3981.77,5459.72 3970.45,5371.32 ; RL5.2@4001.3,5454.93 3970.45,5371.32 ; RL9.1@4165.46,5454.99 4196.32,5370.39 ; RL9.1@4185.01,5459.73 4196.32,5370.39 ; RL9.1@4196.32,5460.44 4196.32,5370.39 ; 4198.04,5368.68 4196.32,5370.39 ; RL9.1@4207.64,5459.73 4196.32,5370.39 ; RL9.1@4227.18,5454.99 4196.32,5370.39 ; 3510.78,5700 3538.67,5672.11 3538.67,5482.63 3516.48,5460.44
  TopLayer w30: RL12.1@2066.79,5456.5 2092.83,5372.44 ; RL12.1@2092.83,5460.44 2092.83,5372.44 ; RL12.1@2118.87,5456.5 2092.83,5372.44 ; RL13.1@2592.64,5456.62 2618.7,5369.67 ; RL13.1@2618.7,5460.44 2618.7,5369.67 ; RL13.1@2644.76,5456.62 2618.7,5369.67 ; RL6.2@3418.59,5456.18 3444.58,5379.13 ; RL6.2@3444.58,5460.44 3444.58,5379.13 ; RL6.2@3470.57,5456.18 3444.58,5379.13 ; RL10.1@4696.14,5456.58 4722.2,5370.51 ; RL10.1@4722.2,5460.44 4722.2,5370.51 ; RL10.1@4748.25,5456.58 4722.2,5370.51 ; R292.1@5146.06,5603.86 5163.39,5543.76 ; R292.1@5163.39,5606.31 5163.39,5543.76 ; R292.1@5180.71,5603.86 5163.39,5543.76 ; RL34.2@5226.11,5444.02 5163.39,5543.76 ; RL34.2@5263.13,5481.03 5163.39,5543.76 ; RL15.1@6173.4,5609.8 6252.01,5531.19 11921.14,5531.19 RL8.1@12003.49,5613.54 ; 6696.86,5534.16 RL16.1@6696.86,5602.53 ; 7222.57,5534.16 RL17.1@7222.57,5602.53 ; 7748.28,5534.16 RL18.1@7748.28,5602.53 ; 8274,5534.16 RL19.1@8274,5602.53 ; D37.A@8988.5,5869.33 8988.5,5789.33 9099.71,5678.13 9099.71,5534.16 ; 9329.69,5534.16 RL21.1@9329.69,5602.53 ; PAX.1@9544.59,2617.3 9455.92,2617.3 9440.84,2602.22 9440.84,2342.22 9465.76,2317.3 ; D19.K@9740.17,2161.75 9619.79,2178.21 D19.K@9740.17,2194.67 ; D19.K@9741.29,2178.21 9558.6,2178.21 9544.59,2192.22 PAX.2@9544.59,2317.3 ; 9855.4,5534.16 RL22.1@9855.4,5602.53 ; 10381.11,5534.16 RL14.1@10381.11,5602.53 ; 10909.59,5538.92 RL4.1@10909.59,5607.29 ; 11427.56,5534.16 pad.0@11427.56,5602.53 ; RL8.1@12004.84,5612.19 RL8.1@12003.49,5613.54 ; D43.A@12028.5,5879.33 12028.5,5739.33 12003.49,5714.32 RL8.1@12003.49,5613.54 ; 2092.83,5372.44 2107.94,5357.33 2631.05,5357.33 ; 2618.7,5369.67 2631.05,5357.33 ; 2631.05,5357.33 3422.77,5357.33 3434.12,5368.68 ; 3434.12,5368.68 3444.58,5379.13 ; 3434.12,5368.68 3967.81,5368.68 4198.04,5368.68 4720.36,5368.68 ; 4720.36,5368.68 5232.9,5368.68 5246.7,5382.48 ; 4720.36,5368.68 4722.2,5370.51 ; 5163.39,5543.76 RL34.2@5246.7,5460.44 ; 5163.39,5543.76 RL34.2@5246.7,5460.44 ; RL34.2@5220.74,5455.99 5246.7,5382.48 ; RL34.2@5220.74,5455.99 5246.7,5382.48 ; RL34.2@5220.74,5455.99 5246.7,5382.48 ; RL34.2@5220.74,5455.99 5246.7,5382.48 ; 5246.7,5382.48 RL34.2@5272.66,5455.99 ; 5246.7,5382.48 RL34.2@5246.7,5460.44 ; 5246.7,5382.48 RL34.2@5272.66,5455.99 ; 5246.7,5382.48 RL34.2@5246.7,5460.44 ; 5246.7,5382.48 RL34.2@5272.66,5455.99 ; 5246.7,5382.48 RL34.2@5246.7,5460.44 ; 5246.7,5382.48 RL34.2@5272.66,5455.99 ; 9465.76,2317.3 PAX.2@9544.59,2317.3 ; 9465.76,2317.3 PAX.2@9544.59,2317.3
  BottomLayer w20: RL5.2@3970.45,5460.44 4039.6,5460.44 ; RL5.2@3971.38,5449.14 4039.6,5460.44 ; RL5.2@3971.38,5471.74 4039.6,5460.44 ; RL5.2@3977.55,5429.92 4039.6,5460.44 ; RL5.2@3977.55,5490.97 4039.6,5460.44 ; D65.A@4011.63,5694.25 4059.04,5665.96 ; D65.A@4020,5705 4059.04,5665.96 ; D65.A@4030.75,5713.37 4059.04,5665.96 ; 4039.6,5460.44 4059.04,5479.88 4059.04,5665.96
  BottomLayer w30: RL9.1@4196.32,5460.44 4196.32,5526.32 4229.27,5559.27 D67.A@4229.27,5705.92 ; RL10.1@4722.2,5460.44 4730,5468.24 D49.A@4730,5700 ; RL15.1@6173.4,5609.8 6317.38,5609.8 6378.5,5670.92 D42.A@6378.5,5869.33 ; RL16.1@6699.03,5609.8 6843.02,5609.8 6904.14,5670.92 D41.A@6904.14,5869.33 ; RL17.1@7224.67,5609.8 7354.6,5609.8 7414.14,5669.33 D40.A@7414.14,5869.33 ; RL30.1@7585.85,2037.79 7610.11,1910.72 RL30.1@7634.37,2037.79 ; RL30.1@7586.1,2044.25 7610.11,2111.49 ; RL30.1@7634.12,2044.25 7610.11,2111.49 ; D18.A@7710.84,1872.74 7640.32,1872.74 7610.11,1902.95 RL30.1@7610.11,2040.09 7610.11,2111.49 ; RL18.1@7750.3,5609.8 7880.24,5609.8 7939.77,5669.33 D39.A@7939.77,5869.33 ; RL31.1@8066.58,2037.79 8090.84,1910.72 RL31.1@8115.1,2037.79 ; RL31.1@8066.65,2043.06 8090.84,2140.09 ; RL31.1@8115.03,2043.06 8090.84,2140.09 ; D17.A@8200.84,1872.74 8124.21,1872.74 8090.84,1906.11 RL31.1@8090.84,2040.09 8090.84,2140.09 ; RL19.1@8275.93,5609.8 8405.87,5609.8 8465.4,5669.33 D38.A@8465.4,5869.33 ; RL32.1@8496.25,2037.79 8520.51,1910.72 ; RL32.1@8496.32,2043.06 8520.51,2140.09 ; RL32.1@8544.7,2043.06 8520.51,2140.09 ; RL32.1@8544.77,2037.79 8520.51,1910.72 ; RL33.1@8934.97,2037.79 8959.23,1910.72 RL33.1@8983.49,2037.79 ; RL33.1@8935.04,2043.06 8959.23,2140.09 ; RL33.1@8983.42,2043.06 8959.23,2140.09 ; D15.A@9058.91,1876.11 8980.84,1876.11 ; D15.A@9070.84,1876.11 8980.84,1876.11 ; RL21.1@9327.2,5609.8 9457.13,5609.8 9516.67,5669.33 D46.A@9516.67,5869.33 ; D21.K@9708.77,1800.99 D20.K@9713.18,1924.4 ; D21.K@9708.93,1805.72 D20.K@9737.32,1927.75 ; D21.K@9709.01,1806.32 D20.K@9741.29,1932.75 ; D21.K@9709.98,1810.27 D20.K@9761.63,1926.04 ; D22.K@9716.97,2049.77 D20.K@9737.32,1927.75 ; D22.K@9717.03,2053.74 D19.K@9741.29,2178.21 ; D22.K@9717.12,2054.57 D20.K@9713.14,1930.79 ; D22.K@9717.76,2045.04 D20.K@9761.64,1929.3 ; D22.K@9717.92,2058.33 D19.K@9765.55,2175.91 ; D19.K@9738.99,2153.95 9611.92,2178.21 D19.K@9738.99,2202.47 ; D21.K@9756.63,1808.81 D20.K@9713.18,1924.4 ; D21.K@9757.25,1799.35 D20.K@9761.63,1926.04 ; D21.K@9757.41,1804.08 D20.K@9737.32,1927.75 ; D21.K@9757.45,1803.27 D20.K@9741.29,1932.75 ; D22.K@9764.36,2043.55 D20.K@9713.14,1930.79 ; D22.K@9764.65,2058.33 D19.K@9717.02,2175.91 ; D22.K@9765.45,2048.22 D20.K@9737.32,1927.75 ; D22.K@9765.54,2053.74 D19.K@9741.29,2178.21 ; D22.K@9765.6,2053.02 D20.K@9761.64,1929.3 ; RL22.1@9852.83,5609.8 9982.76,5609.8 10042.3,5669.33 D47.A@10042.3,5869.33 ; RL14.1@10378.46,5609.8 10508.4,5609.8 10567.93,5669.33 D45.A@10567.93,5869.33 ; RL4.1@10904.09,5609.8 11034.03,5609.8 11093.56,5669.33 D48.A@11093.56,5869.33 ; RL7.1@11424.12,5610.92 11424.12,5684.94 11458.5,5719.33 D44.A@11458.5,5879.33 ; 7610.11,2111.49 7640.84,2142.22 8092.97,2142.22 ; 8090.84,2140.09 8092.97,2142.22 ; 8092.97,2142.22 9360.84,2142.22 9396.83,2178.21 D19.K@9741.29,2178.21 ; 8520.51,1910.72 RL32.1@8520.51,2040.09 ; RL32.1@8520.51,2040.09 8520.51,1892.55 8540.84,1872.22 ; RL32.1@8520.51,2040.09 8520.51,2140.09 ; 8540.84,1872.22 D16.A@8620.84,1872.22 8540.84,1872.22 ; 8959.23,2140.09 RL33.1@8959.23,2040.09 8959.23,1897.72 8980.84,1876.11 ; D20.K@9713.14,1930.79 D22.K@9741.29,2051.4 ; D20.K@9713.14,1930.79 D22.K@9741.29,2057.27 ; D20.K@9713.18,1924.4 D21.K@9733.09,1802.53 ; D20.K@9713.18,1924.4 D21.K@9741.29,1810.73 ; D19.K@9717.02,2175.91 D22.K@9741.29,2051.4 ; D19.K@9717.02,2175.91 9717.03,2049.05 9741.29,1922.03 9765.55,2049.1 D19.K@9765.55,2175.91 ; D19.K@9717.02,2175.91 9741.29,2048.84 D19.K@9765.55,2175.91 ; D21.K@9733.09,1802.53 D20.K@9761.63,1926.04 ; D21.K@9733.09,1802.53 D20.K@9741.29,1932.75 ; D21.K@9733.09,1802.53 D20.K@9737.32,1927.75 ; D21.K@9733.09,1802.53 D21.K@9741.29,1810.73 ; D20.K@9737.32,1927.75 D22.K@9741.29,2051.4 ; D20.K@9737.32,1927.75 D21.K@9741.29,1810.73 ; D20.K@9737.32,1927.75 D22.K@9741.29,2057.27 ; D21.K@9741.29,1810.73 D20.K@9761.63,1926.04 ; D21.K@9741.29,1810.73 D19.K@9741.29,2178.21 ; D22.K@9741.29,2051.4 D20.K@9761.64,1929.3 ; D22.K@9741.29,2051.4 D19.K@9765.55,2175.91 ; D22.K@9741.29,2057.27 D20.K@9761.64,1929.3
  BottomLayer w40: RL1.1@-10.67,5460.44 189.56,5460.44 190,5460 ; RL1.1@-9.26,5439.15 150.67,5460.44 RL1.1@-9.26,5481.73 ; RL2.1@493.96,5458.41 515.21,5348.5 ; RL2.1@516.72,5439.16 665.44,5460.44 ; RL2.1@516.72,5481.73 665.44,5460.44 ; RL2.1@536.45,5458.41 515.21,5348.5 ; D51.A@750,5700 750,5545 665.44,5460.44 ; RL3.1@1019.83,5458.47 1041.08,5344.91 ; RL3.1@1042.91,5439.18 1165.44,5460.44 ; RL3.1@1042.91,5481.7 1165.44,5460.44 ; RL3.1@1062.33,5458.47 1041.08,5344.91 ; D50.A@1250,5700 1250,5545 1165.44,5460.44 ; RL11.1@1545.72,5458.38 1566.95,5350.14 ; RL11.1@1568.76,5439.18 1692.79,5460.44 ; RL11.1@1568.76,5481.7 1692.79,5460.44 ; RL11.1@1588.19,5458.38 1566.95,5350.14 ; D55.A@1760,5700 1760,5527.65 1692.79,5460.44 ; RL12.1@2071.62,5458.09 2092.83,5363.46 ; RL12.1@2094.73,5439.19 2212.79,5460.44 ; RL12.1@2094.73,5481.7 2212.79,5460.44 ; RL12.1@2114.04,5458.09 2092.83,5363.46 ; D54.A@2265.64,5700 2265.64,5513.3 2212.79,5460.44 ; RL13.1@2618.7,5460.44 2780.44,5460.44 2820,5500 D53.A@2820,5700 ; RL13.1@2620.11,5439.15 2780.04,5460.44 RL13.1@2620.11,5481.73 ; D38.A@8465.4,5869.33 8465.4,6379.33 8585,6498.93 9388.91,6498.93 9438.5,6449.33 PB7.15@9438.5,6369.33 ; 190,5460 D52.A@190,5700 190,6020 239.35,6069.35 1417.88,6069.35 ; 190,5460 190,5391.93 237.56,5344.37 511.08,5344.37 ; 511.08,5344.37 515.21,5348.5 ; 511.08,5344.37 1040.55,5344.37 ; 515.21,5348.5 RL2.1@515.21,5460.44 665.44,5460.44 ; 1040.55,5344.37 1041.08,5344.91 ; 1040.55,5344.37 1572.72,5344.37 ; 1041.08,5344.91 RL3.1@1041.08,5460.44 1165.44,5460.44 ; 1417.88,6069.35 1452.35,6034.89 ; 1417.88,6069.35 PC7.15@1452.35,5991.59 ; PC7.15@1452.35,5991.59 1452.35,6034.89 ; PC7.15@1452.35,5991.59 1452.35,6034.89 ; PC7.15@1452.35,5991.59 1452.35,6034.89 ; 1566.95,5350.14 RL11.1@1566.95,5460.44 1692.79,5460.44 ; 1566.95,5350.14 1572.72,5344.37 ; 1572.72,5344.37 2073.74,5344.37 2092.83,5363.46 ; 2092.83,5363.46 RL12.1@2092.83,5460.44 2212.79,5460.44
24V+: 
24V-情报-负压: PA3.1 PAX.6 | length 1621.1
  BottomLayer w20: PAX.6@9733.84,2331.11 9794.59,2367.3 ; PAX.6@9744.59,2317.3 9794.59,2367.3 ; PAX.6@9758.4,2306.55 9794.59,2367.3 ; PA3.1@9958.24,3215.53 10005.44,3138.9 ; PA3.1@9976.77,3224.21 10005.44,3138.9 ; PA3.1@10034.12,3224.21 10005.44,3138.9 ; PA3.1@10052.64,3215.53 10005.44,3138.9 ; 9794.59,2367.3 9794.59,2938.05 10005.44,3148.9 ; 10005.44,3138.9 PA3.1@10005.44,3228.9 10005.44,3148.9 ; 10005.44,3138.9 10005.44,3148.9
24V-情报-远值: PA3.3 PAX.7 | length 1593.4
  BottomLayer w20: PAX.7@9829.65,2628.62 9844.59,2712.3 ; PAX.7@9844.59,2617.3 9844.59,2903.05 10040.44,3098.9 ; PAX.7@9844.59,2627.3 9844.59,2712.3 ; PAX.7@9859.53,2628.62 9844.59,2712.3 ; 10050.44,3098.9 10355.44,3098.9 10405.44,3148.9 ; PA3.3@10358.75,3213.86 10405.44,3148.9 ; PA3.3@10376.87,3223.62 10405.44,3148.9 ; PA3.3@10405.44,3228.9 10405.44,3148.9 ; PA3.3@10434.01,3223.62 10405.44,3148.9 ; PA3.3@10452.13,3213.86 10405.44,3148.9
24V-情报-远启: PA3.5 PAX.9 | length 1993.8
  BottomLayer w20: PAX.9@9927.18,2619.05 9944.59,2704.8 PAX.9@9962,2619.05 ; PAX.9@9944.59,2617.3 9944.59,2878.05 ; 9954.59,2878.05 10135.44,3058.9 10781.69,3058.9 10805.44,3082.65 PA3.5@10805.44,3228.9 ; PA3.5@10757.44,3218.79 10805.44,3109.84 ; PA3.5@10776.6,3225.35 10805.44,3109.84 ; PA3.5@10834.28,3225.35 10805.44,3109.84 ; PA3.5@10853.44,3218.79 10805.44,3109.84
24V-面板-值机: D21.A PAX.8 R217.2 RL31.2 | length 4426
  BottomLayer w25: R217.2@8444.48,1770.71 8490.84,1722.22 ; R217.2@8479.86,1788.4 8490.84,1722.22 ; PAX.8@9829.63,2316.2 9844.59,2214.8 ; PAX.8@9859.55,2316.2 9844.59,2214.8 ; D21.A@10106.77,1807.96 10102.78,1722.22 ; D21.A@10129.93,1775.84 10018.72,1802.53 D21.A@10129.93,1829.21 ; D21.A@10156.43,1789.22 10102.78,1722.22 ; 8490.84,1722.22 R217.2@8460.84,1782.22 8460.84,1752.22 8490.84,1722.22 ; 8490.84,1722.22 10102.78,1722.22 ; 9844.59,2214.8 PAX.8@9844.59,2317.3 9844.59,1908.47 9950.53,1802.53 D21.A@10133.09,1802.53 ; 10102.78,1722.22 D21.A@10133.09,1802.53 ; 10102.78,1722.22 10133.09,1752.53 ; 10133.09,1752.53 D21.A@10133.09,1802.53 ; 10133.09,1752.53 10107.21,1795.31 10133.09,1752.53 ; 10133.09,1752.53 10158.97,1795.31 10133.09,1752.53 ; 10133.09,1752.53 D21.A@10133.09,1802.53
  BottomLayer w30: RL31.2@8366.73,2036.55 8390.84,1956.11 ; RL31.2@8390.84,2040.09 8390.84,1956.11 ; RL31.2@8414.95,2036.55 8390.84,1956.11 ; R217.2@8443.4,1783.69 8460.84,1886.11 ; R217.2@8460.84,1782.22 8460.84,1886.11 ; R217.2@8478.28,1783.69 8460.84,1886.11 ; 8390.84,1956.11 8460.84,1886.11
24V-面板-故障: D19.A PAX.14 R215.2 RL33.2 | length 3775.7
  TopLayer w30: RL33.2@9234.97,2042.38 9259.23,2169.46 RL33.2@9283.49,2042.38 ; RL33.2@9261.52,2015.83 9388.6,2040.09 RL33.2@9261.52,2064.35 ; R215.2@9388.96,2254.82 9309.23,2272.22 ; R215.2@9388.96,2289.62 9309.23,2272.22 ; D19.A@10140.17,2161.75 10019.79,2178.21 D19.A@10140.17,2194.67 ; D19.A@10141.29,2178.21 9880.84,2178.21 9860.84,2158.21 9860.84,1772.53 9829.34,1741.03 9707.61,1741.03 9706.43,1742.22 9600.84,1742.22 9560.84,1782.22 9560.84,2022.22 9542.97,2040.09 RL33.2@9259.23,2040.09 9259.23,2222.22 9309.23,2272.22 ; 9309.23,2272.22 R215.2@9390.84,2272.22 9309.23,2272.22
  BottomLayer w30: D19.A@10117.09,2181.12 PAX.14@10144.59,2307.66 ; D19.A@10121.51,2201.44 PAX.14@10144.59,2317.3 ; D19.A@10141.84,2199.82 PAX.14@10144.59,2317.3 ; D19.A@10162.17,2200.75 PAX.14@10144.59,2317.3 ; D19.A@10165.6,2179.88 PAX.14@10144.59,2307.66 ; PAX.14@10144.59,2307.66 D19.A@10141.29,2178.21 10144.59,2181.51 PAX.14@10144.59,2317.3
24V-面板-滤网: D22.A PAX.12 R216.2 RL32.2 | length 3935.7
  TopLayer w20: RL32.2@8791.55,2035.16 8820.51,1952.55 ; RL32.2@8820.51,2040.09 8820.51,1952.55 ; RL32.2@8849.46,2035.16 8820.51,1952.55 ; D22.A@10138.76,2030.05 10049.79,2051.4 D22.A@10138.76,2072.74 ; D22.A@10141.29,2051.4 9920.01,2051.4 9900.84,2032.22 9900.84,1755.96 9845.91,1701.03 9545.46,1701.03 9500.84,1745.65 9500.84,1917.75 9476.37,1942.22 8830.84,1942.22 8820.51,1952.55
  BottomLayer w30: RL32.2@8796.25,2037.79 8820.51,1910.72 RL32.2@8844.77,2037.79 ; RL32.2@8820.51,2040.09 8820.51,1842.55 8880.84,1782.22 ; R216.2@8948.65,1764.86 8880.84,1782.22 ; R216.2@8948.65,1799.58 8880.84,1782.22 ; R216.2@8950.84,1782.22 8880.84,1782.22 ; PAX.12@10044.59,2317.3 10044.59,2098.47 ; D22.A@10128.21,2030.83 10044.59,2098.47 ; D22.A@10149.4,2074.38 10044.59,2098.47 ; 10044.59,2098.47 D22.A@10141.29,2051.4 ; 10044.59,2098.47 10091.66,2051.4 ; 10091.66,2051.4 D22.A@10141.29,2051.4 ; 10091.66,2051.4 10135.3,2075.02 10091.66,2051.4 ; 10091.66,2051.4 10135.3,2027.77 10091.66,2051.4 ; 10091.66,2051.4 D22.A@10141.29,2051.4
24V-面板-运行: D20.A PAX.10 R218.2 RL30.2 | length 4543.3
  BottomLayer w25: RL30.2@7883.42,2036.93 7910.11,1925.72 RL30.2@7936.79,2036.93 ; RL30.2@7910.11,2040.09 7910.11,1922.95 7970.84,1862.22 7970.84,1782.22 7970.84,1702.22 7990.84,1682.22 10200.84,1682.22 10230.84,1712.22 10230.84,1912.22 10215.3,1927.75 ; R218.2@8204.96,1662.31 8099.32,1682.22 R218.2@8204.96,1702.13 ; R218.2@8208.68,1662.31 8314.32,1682.22 R218.2@8208.68,1702.13
  BottomLayer w30: PAX.10@9944.59,2317.3 9944.59,1998.47 10015.3,1927.75 ; D20.A@10134.89,1903.51 10015.3,1927.75 ; D20.A@10134.89,1952 10015.3,1927.75 ; D20.A@10141.13,1903.68 10215.3,1927.75 ; D20.A@10141.13,1951.82 10215.3,1927.75 ; 10015.3,1927.75 D20.A@10137.32,1927.75 10215.3,1927.75
24VIN: 
24VIN2: 
164CLK: 
164SDA: 
165S_DO1: 
165S_DO2: 
165S_DO3: 
165S_DO4: 
220V_N: pad.0@5876.88,4493.05 PB1'.1 PB1.1 PB2.2 PB2.4 PB2.6 PB3.2 PB3.4 PB3.6 PB4.2 PB4.4 PB4.6 PB4.8 PB5.3 PC1.1 PC2.1 PC3.1 PC3.2 PC5.1 PC5.2 PC6.2 SX1.2 | length 34122.1
  TopLayer w20: PC3.2@2872.64,3996.99 PC3.1@3072.64,3996.99 ; PC3.2@2876.19,3968.16 2991.7,3996.99 ; PC3.2@2876.19,4025.83 2991.7,3996.99 ; PC3.2@2882.75,3948.99 2991.7,3996.99 ; PC3.2@2882.75,4045 2991.7,3996.99 ; PC3.1@3062.54,3948.99 2953.59,3996.99 ; PC3.1@3062.54,4045 2953.59,3996.99 ; PC3.1@3069.1,3968.16 2953.59,3996.99 ; PC3.1@3069.1,4025.83 2953.59,3996.99 ; PB1'.1@5766.94,4512.28 5770.31,4512.28 5870.31,4412.28
  TopLayer w30: SX1.2@2993.22,6466.49 4785.02,6466.49 4880,6371.5 PC6.2@4880,6150 ; PC6.2@4836.43,6176.51 4880,6319.06 ; PC6.2@4880,6170 4880,6319.06 ; PC6.2@4923.57,6176.51 4880,6319.06
  TopLayer w80: PC1.1@305.12,3995.93 305.12,3744.64 385.17,3664.59 514.47,3664.59 ; 4884.85,3675.47 PC5.2@4884.85,3996.99 ; 5084.85,3664.25 PC5.1@5084.85,3996.99 ; 6499.43,3920.66 PB2.2@6499.43,4146.34 ; 6899.43,3967.41 PB2.4@6899.43,4146.34 ; 7299.43,3908.16 PB2.6@7299.43,4146.34 ; 8169.43,3920.66 PB3.2@8169.43,4146.34 ; 8569.43,3967.41 PB3.4@8569.43,4146.34 ; 8969.43,3908.16 PB3.6@8969.43,4146.34 ; 9649.43,3940.66 PB4.2@9649.43,4166.34 ; 10049.43,3940.66 PB4.4@10049.43,4166.34 ; 10449.43,3928.16 PB4.6@10449.43,4166.34 ; 10849.43,3928.16 PB4.8@10849.43,4166.34 ; 11599.38,3917.55 PB5.3@11599.38,4155.73
  TopLayer w120: 5870.31,4412.28 5870.31,4568.03 5916.54,4614.26 5962.78,4568.03 ; pad.0@5883.2,4506.05 5929.44,4552.28 ; pad.0@5925.29,4459.81 5971.53,4506.05
  TopLayer w300: 514.47,3664.59 514.81,3664.25 4959.37,3664.25 ; 5870.31,4412.28 5870.31,4140.87 6196.38,3814.8 11676.16,3814.8
  BottomLayer w80: PC1.1@300.51,3989.25 300.51,3849.25 ; PC1.1@305.12,3995.93 300.51,3849.25 ; 425.45,3624.31 300.51,3749.25 300.51,3849.25 ; 475.51,3734.25 415.51,3734.25 300.51,3849.25 ; PC2.1@1840.12,3995.93 1841.7,3766.05 PC2.1@1841.7,3988.31 ; 2872.64,3774.2 PC3.2@2872.64,3996.99 ; 3072.64,3786.8 PC3.1@3072.64,3996.99 ; 4884.85,3670.55 PC5.2@4884.85,3996.99 ; 4959.37,3664.25 5084.85,3789.73 PC5.1@5084.85,3996.99 ; 6499.43,3920.66 PB2.2@6499.43,4146.34 ; 6899.43,3967.41 PB2.4@6899.43,4146.34 ; 7299.43,3908.16 PB2.6@7299.43,4146.34 ; 8169.43,3920.66 PB3.2@8169.43,4146.34 ; 8569.43,3967.41 PB3.4@8569.43,4146.34 ; 8969.43,3908.16 PB3.6@8969.43,4146.34 ; 9649.43,3940.66 PB4.2@9649.43,4166.34 ; 10049.43,3940.66 PB4.4@10049.43,4166.34 ; 10449.43,3928.16 PB4.6@10449.43,4166.34 ; 10849.43,3928.16 PB4.8@10849.43,4166.34 ; 11599.38,3917.55 PB5.3@11599.38,4155.73
  BottomLayer w120: pad.0@5870.31,4552.68 5870.31,4574.42 ; 5939.66,4569.41 PB1.1@5939.66,4591.15 ; 5971.53,4490.55 5971.53,4512.28
  BottomLayer w300: 514.81,3664.25 4959.37,3664.25 ; 5870.31,4412.28 5870.31,4140.87 6196.38,3814.8 11676.16,3814.8
485-A: 
485-B: 
485_GND_1: 
485_GND_2: 
485_GND_3: 
485_VCC_1: 
485_VCC_2: 
485_VCC_3: 
+10V: 
+15V: 
<-变频故障: 
<-变频运行: 
<-工频故障: 
<-工频运行: 
<-急停按钮: 
<-本地值机: 
<-本地运行: 
<-远值使能: 
<-远起使能: 
AC24GATE1: 
AC24GATE2: 
AC24V1: PB6.1 RL8.4 | length 1777
  BottomLayer w80: PB6.1@11921.07,6272.28 12168.5,6024.85 12168.5,4809.8 12259.02,4809.8 ; RL8.4@12003.49,4813.54 12007.23,4809.8 12123.48,4809.8
AC24V2: PB5.6 PB6.2 | length 2591.2
  BottomLayer w80: PB6.2@11721.07,6272.28 11721.07,6082.28 11588.5,5949.71 11588.5,5443.64 11900.34,5131.81 11900.34,4380.17 12184.83,4380.17 12199.38,4365.62 PB5.6@12199.38,4155.73
AD1: 
AD2: 
AD3: 
AD4: 
AD5: 
AD6: 
CLK_165: 
C变频: 
C情报输出: PA1.5 RL30.4 RL31.4 RL32.4 RL33.4 | length 2766.9
  TopLayer w50: RL31.4@8390.84,2540.09 8330.84,2600.09 8330.84,2982.22 8465.44,3116.82 ; PA1.5@8431.78,3223.73 8465.44,3116.82 ; PA1.5@8465.44,3228.9 8465.44,3116.82 ; PA1.5@8499.1,3223.73 8465.44,3116.82
  BottomLayer w50: RL30.4@7910.11,2540.09 7910.11,2472.95 7960.84,2422.22 8390.67,2422.22 ; RL31.4@8390.84,2540.09 8390.84,2422.38 8390.67,2422.22 ; RL32.4@8820.51,2540.09 8820.51,2422.22 ; RL33.4@9259.23,2540.09 9259.23,2452.22 9229.23,2422.22 8820.51,2422.22 ; 8390.67,2422.22 8820.51,2422.22
DA_ADD1: 
DA_ADD2: 
DA_WR1: 
DA_WR2: 
DB0: 
DB1: 
DB2: 
DB3: 
DB4: 
DB5: 
DB6: 
DB7: 
DE/RE: 
DE/RE2: 
DI1: 
DI2: 
DI3: 
DI4: 
DI5: 
DI6: 
DI7: 
DI8: 
DI9: 
DI10: 
DI11: 
DI12: 
DI13: 
DI14: 
DI15: 
DI15A: 
DI16: 
DI17: 
DI18: 
DI19: 
DI20: 
DI21: 
DI22: 
DI23: 
DI24: 
DI25: 
DI26: 
DI27: 
DI28: 
DI29: 
DI30: 
DI31: 
DI32: 
DI33: 
DI34: 
DI35: 
DI36: 
DI37: 
DI38: 
DI39: 
DI40: 
EX_A1: 
EX_B1: 